# Altium PCB Hitachi_wind_pcb.PcbDoc
Units mm, origin at the board's own origin, x right, y up, seen from the top; angles counter-clockwise.
Board outline 72.95 x 59.62 mm, 2 copper layers (Top Layer, Bottom Layer); 43 components, 26 nets, 194 pads, 17 vias.
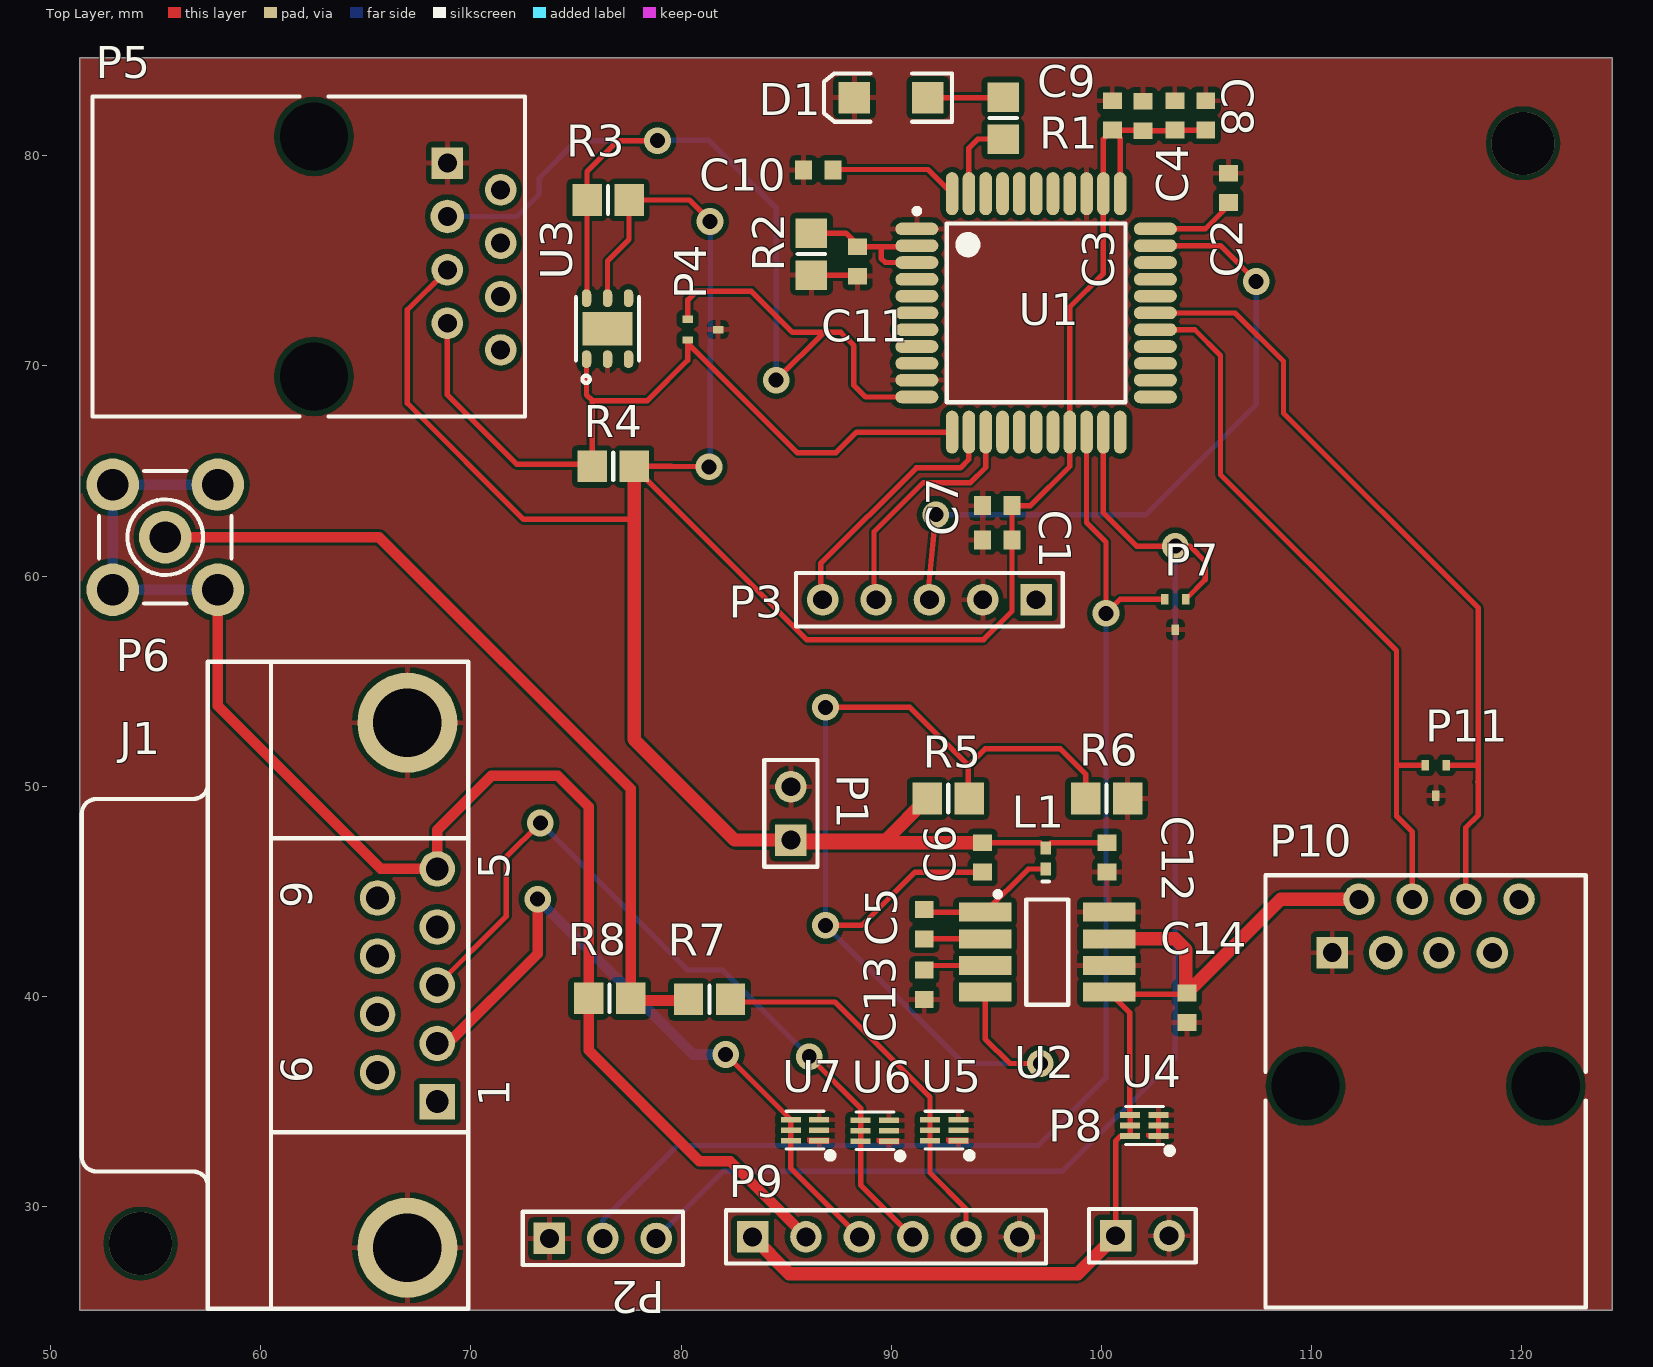
[diagram p0: Top Layer view]
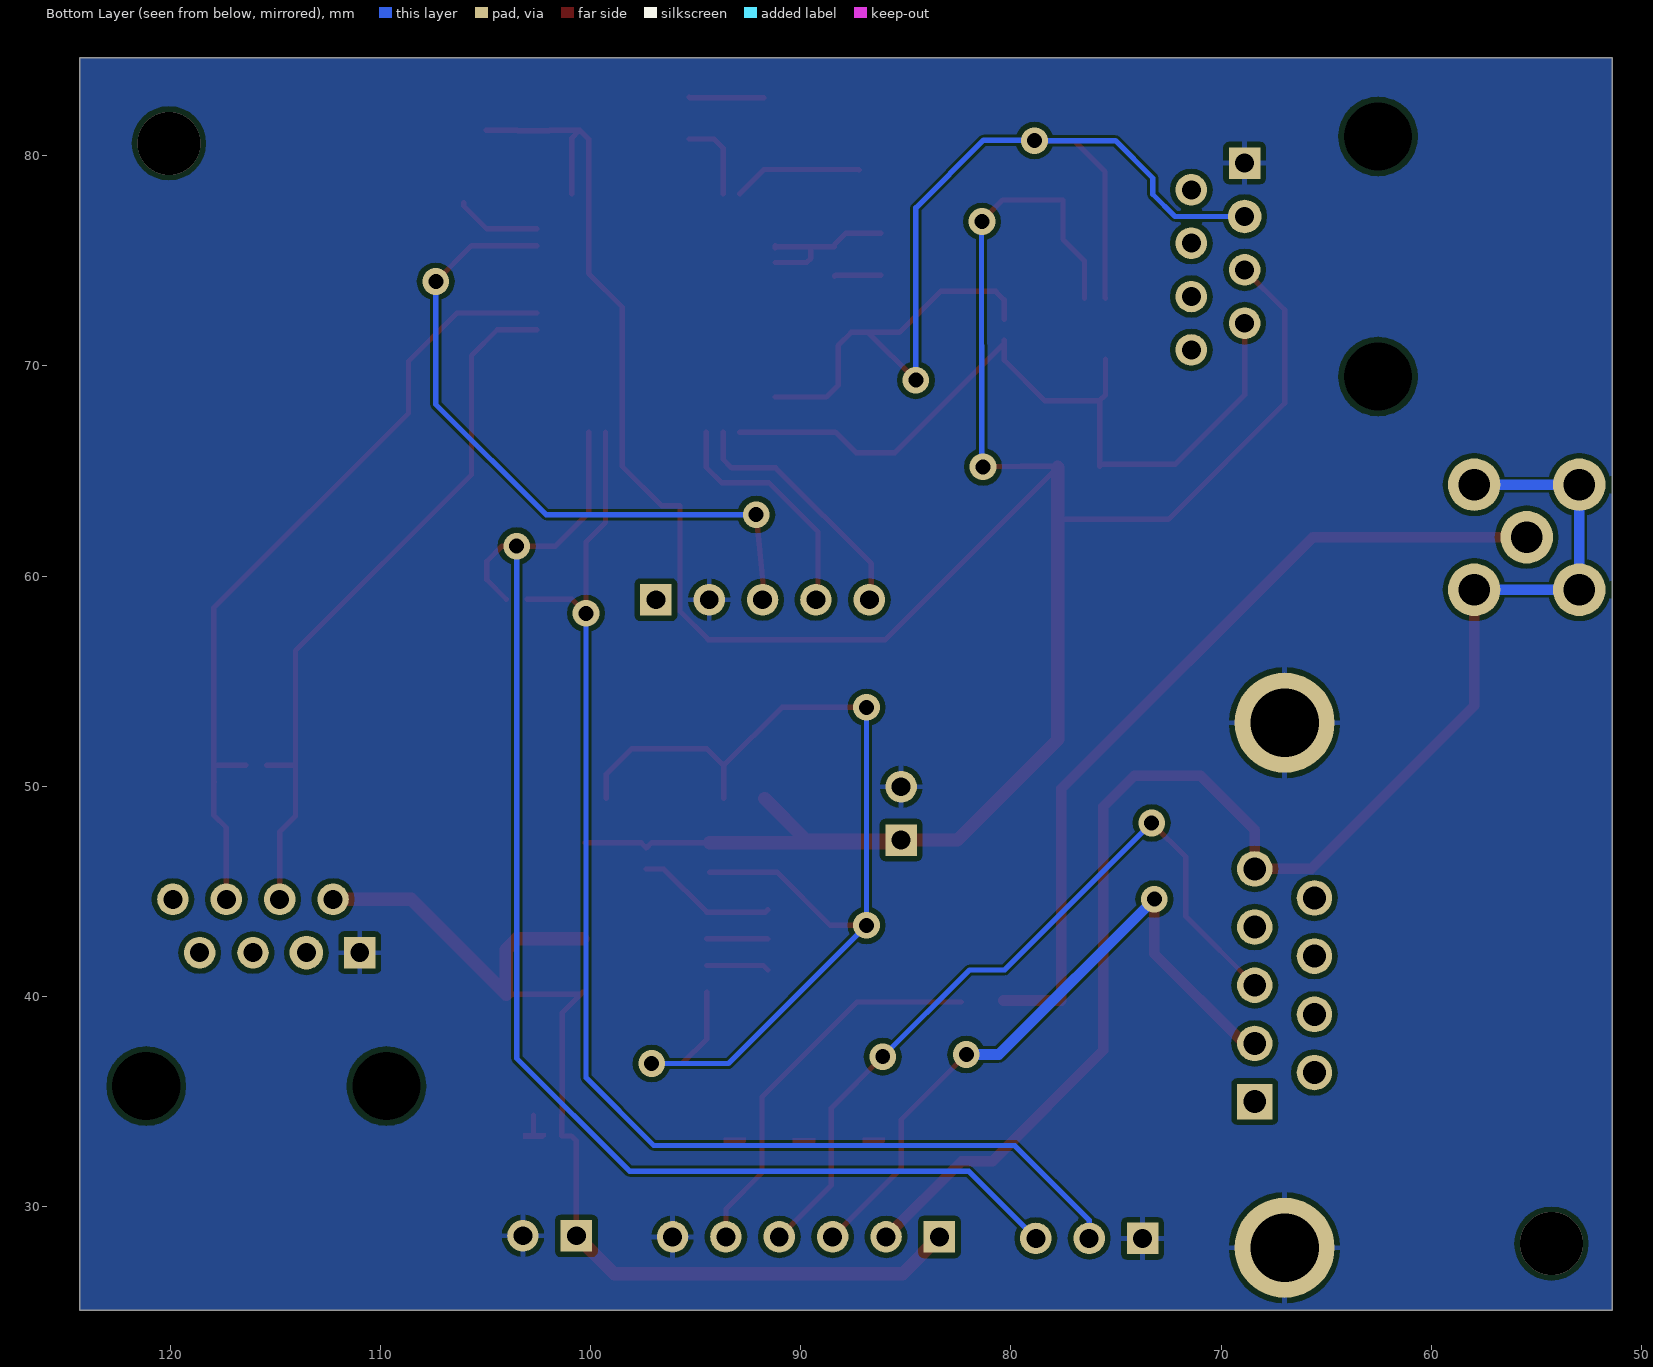
[diagram p1: Bottom Layer view, seen from below]

## Layer stack, top to bottom
Top Solder: solder mask 0.0102, Solder Resist, Dk 3.5
Top Layer: signal copper 0.0356
Dielectric 1: dielectric 0.32, FR-4, Dk 4.8
Bottom Layer: signal copper 0.0356
Bottom Solder: solder mask 0.0102, Solder Resist, Dk 3.5

## Board outline
51.375,25.05 51.375,84.675 124.325,84.675 124.325,25.05

## Design rules (kind name [scope] priority, off if disabled: settings)
Clearance Clearance_3 [InNamedPolygon('TOP-GND')] p1: gap=0.254 ignorepadtopadclearanceinfootprint=FALSE except(0: Arc-Hole Track-Hole SMDPad-Hole THPad-Hole Via-Hole Fill-Hole Poly-Hole Region-Hole Text-Hole; 0.5: Arc-Via Track-Via)
Clearance Clearance_2 [InNamedPolygon('TOP-GND')] p2: gap=0.254 ignorepadtopadclearanceinfootprint=FALSE except(0: Arc-Hole Track-Hole SMDPad-Hole THPad-Hole Via-Hole Fill-Hole Poly-Hole Region-Hole Text-Hole; 0.5: Arc-Via Track-Via)
Clearance Clearance_1 [InNamedPolygon('TOP-GND')] p3: gap=0.254 ignorepadtopadclearanceinfootprint=FALSE except(0: Arc-Hole Track-Hole SMDPad-Hole THPad-Hole Via-Hole Fill-Hole Poly-Hole Region-Hole Text-Hole; 0.5: Arc-Arc Arc-Track Track-Track)
Clearance [All] p4: gap=0.254 ignorepadtopadclearanceinfootprint=TRUE except(0: Arc-Hole Track-Hole SMDPad-Hole THPad-Hole Via-Hole Fill-Hole Poly-Hole Region-Hole Text-Hole; 0.125: Arc-Arc Arc-Track Arc-SMDPad Arc-Fill Arc-Poly Arc-Region Track-Track Track-SMDPad Track-Fill Track-Poly Track-Region SMDPad-SMDPad)
HoleSize [All] p1: absolutevalues=TRUE maxlimit=4 minlimit=0.025 maxpercent=80.000 minpercent=20.000
MinimumSolderMaskSliver [All] p1: minsoldermaskwidth=0
PolygonConnect [All] p1: connectstyle=Relief reliefconductorwidth=0.254 reliefentries=4 polygonreliefangle="90 Angle" airgapwidth=0.254
RoutingVias [All] p1: holewidth=0.711 width=1.27 viastyle="Through Hole" minholewidth=0.711 minwidth=1.27 maxholewidth=2 maxwidth=2
SilkToSolderMaskClearance [IsPad] p1: minsilkscreentomaskgap=0.1 clearancetoexposedcopper=TRUE
SolderMaskExpansion [All] p1: expansion=0.102
Width [All] p1: maxlimit=1 minlimit=0.1 preferedwidth=0.254 minimp=50.000000 maximp=50.000000 favimp=50.000000
27 further rules are at their usual default settings.

## Components (designator, comment, footprint, x,y, rotation, side; value= is the part's Value field where it differs from the comment)
C1 "Cap" 1608[0603] 95.05,61.725 r0 top value=100nF
C2 "Cap" 1608[0603] 106.05,78.475 r90 top value=1uF
C3 "Cap" 1608[0603] 103.5,81.925 r270 top value=100nF
C4 "Cap" 1608[0603] 101.979,81.9 r270 top value=100nF
C5 "Cap" 1608[0603] 91.575,43.425 r270 top value=100pF
C6 "Cap" 1608[0603] 94.35,46.609 r90 top value=100pF
C7 "Cap" 1608[0603] 95.05,63.35 r0 top value=1uF
C8 "Cap" 1608[0603] 104.975,81.925 r270 top value=1uF
C9 "Cap" 1608[0603] 100.525,81.925 r270 top value=1uF
C10 "Cap" 1608[0603] 86.525,79.325 r0 top value=100pF
C11 "Cap" 1608[0603] 88.4,74.975 r90 top value=100nF
C12 "Cap" 1608[0603] 100.275,46.609 r90 top value=100pF
C13 "Cap" 1608[0603] 91.575,40.55 r90 top value=100pF
C14 "Cap" 1608[0603] 104.075,39.45 r90 top value=100pF
D1 "LED0" 3.2X1.6X1.1 90,82.775 r180 top
J1 "D Connector 9" DSUB1.385-2H9 57.475,40.525 r90 top
L1 "Inductor" 0402-A 97.35,46.559 r90 top value=10mH
P1 "voltage tp" HDR1X2 85.225,47.435 r90 top
P2 "FTDI" HDR1X3 73.735,28.475 r0 top
P3 "programmer" HDR1X5 96.9,58.875 r180 top
P4 "ESD-RCLAMP0582B" SC75 81.039,71.732 r180 top
P5 "RJ45 header" "RJ-45 Header" 51.985,75.21 r270 top
P6 "SMB" SMB_V-RJ45 55.45,61.85 r0 top
P7 "ESD-RCLAMP0582B" SC75 103.525,58.175 r90 top
P8 "V_input" HDR1X2 100.685,28.6 r0 top
P9 "General_connector" HDR1X6 83.405,28.55 r0 top
P10 "inclinometer_header" "RJ-45 Header" 115.44,25.185 r0 top
P11 "ESD-RCLAMP0582B" SC75 115.925,50.275 r90 top
R1 "Res1" 6-0805_M 95.325,81.8 r270 top value=1.5K
R2 "POT" 6-0805_M 86.2,75.325 r90 top value=1000
R3 "Res1" 6-0805_M 76.525,77.9 r0 top value=4K
R4 "Res1" 6-0805_M 76.775,65.225 r180 top value=4K
R5 "Res1" 6-0805_M 92.716,49.414 r180 top value=1K
R6 "Res1" 6-0805_M 100.254,49.414 r180 top value=1K
R7 "Res1" 6-0805_M 81.354,39.85 r0 top value=1K
R8 "Res1" 6-0805_M 76.6,39.9 r0 top value=1K
U1 "CY8C424xTQFP44" CYP-AX44-51-85064_M 96.9,72.525 r0 top
U2 "LMR23625Q1" SOIC-8 97.425,42.1 r0 top
U3 "SHT21" SON100P300X300X110-7N 76.5,71.775 r90 top
U4 "TVS3300" WSON-6_M 102.05,33.85 r90 top
U5 "TVS3300" WSON-6_M 92.525,33.625 r90 top
U6 "TVS3300" WSON-6_M 89.225,33.6 r90 top
U7 "TVS3300" WSON-6_M 85.9,33.625 r90 top

## Footprints (in the part's own frame and the unit in brackets; to place one, negate y for a bottom-side part, rotate by r counter-clockwise, add the part's x,y. Pads: shape width x height; smd on the part's side, far side on the other; paste and mask are expansions set on the pad)
3.2X1.6X1.1 [mm] "SMT LED; 2 Flat Leads"
  rect 1.5x1.5 smd: 1(-1.75,0) 2(1.75,0)
  silkscreen extent -2.9,-1.15 3.2,1.15
6-0805_M [mm] "Chip Resistor, Body 2.0x1.2mm, IPC Low Density"
  rect 1.4x1.5 smd: 1(-1,0) 2(1,0)
  silkscreen extent 0,-0.65 0,0.65, body extent -1.07,-0.7 1.07,0.7, height 0.7
0402-A [mm] "Chip Inductor, Body 1.0x0.5mm, IPC High Density"
  rect 0.6x0.5 smd: 1(-0.5,0) 2(0.5,0)
  silkscreen extent -1.1,-0.15 -1.1,0.15, body extent -0.55,-0.3 0.55,0.3, height 0.55
1608[0603] [mm] "Chip Capacitor, Body 1.6x0.8mm, IPC High Density"
  rect 0.8x0.9 smd: 1(-0.7,0) 2(0.7,0)
  body extent -0.87,-0.48 0.87,0.48, height 1.3
CYP-AX44-51-85064_M [mm] "TQFP, 44-Leads, Body 10x10mm, Pitch 0.8mm, IPC Low Density"
  oval 2.05x0.6 smd: 1(-5.675,4) 2(-5.675,3.2) 3(-5.675,2.4) 4(-5.675,1.6) 5(-5.675,0.8) 6(-5.675,0) 7(-5.675,-0.8) 8(-5.675,-1.6) 9(-5.675,-2.4) 10(-5.675,-3.2) 11(-5.675,-4) 23(5.675,-4) 24(5.675,-3.2) 25(5.675,-2.4) 26(5.675,-1.6) 27(5.675,-0.8) 28(5.675,0) 29(5.675,0.8) 30(5.675,1.6) 31(5.675,2.4) 32(5.675,3.2) 33(5.675,4)
  oval 0.6x2.05 smd: 12(-4,-5.675) 13(-3.2,-5.675) 14(-2.4,-5.675) 15(-1.6,-5.675) 16(-0.8,-5.675) 17(0,-5.675) 18(0.8,-5.675) 19(1.6,-5.675) 20(2.4,-5.675) 21(3.2,-5.675) 22(4,-5.675) 34(4,5.675) 35(3.2,5.675) 36(2.4,5.675) 37(1.6,5.675) 38(0.8,5.675) 39(0,5.675) 40(-0.8,5.675) 41(-1.6,5.675) 42(-2.4,5.675) 43(-3.2,5.675) 44(-4,5.675)
  silkscreen extent -5.8,-4.25 4.25,4.97, body extent -5,-5 5,5, height 1.6
DSUB1.385-2H9 [mm] "Connector; D Subminiature; 9 Position; Right Angle; Pitch 1.385 mm"
  rect 1.69x1.69 hole 1.09: 1(-5.54,-10.92)
  round 1.69 hole 1.09: 2(-2.77,-10.92) 3(0,-10.92) 4(2.77,-10.92) 5(5.54,-10.92) 6(-4.155,-8.08) 7(-1.385,-8.08) 8(1.385,-8.08) 9(4.155,-8.08)
  round 4.76 hole 3.26: 10(-12.495,-9.5) 11(12.495,-9.5)
  silkscreen extent -15.4,-12.4 15.4,6
HDR1X2 [mm] "Connector; Header; 2 Position"
  rect 1.5x1.5 hole 0.9: 1(0,0)
  round 1.5 hole 0.9: 2(2.54,0)
  silkscreen extent -1.27,-1.27 3.81,1.27
HDR1X3 [mm] "Connector; Header; 3 Position"
  rect 1.5x1.5 hole 0.9: 1(0,0)
  round 1.5 hole 0.9: 2(2.54,0) 3(5.08,0)
  silkscreen extent -1.27,-1.27 6.35,1.27
HDR1X5 [mm] "Connector; Header; 5 Position"
  rect 1.5x1.5 hole 0.9: 1(0,0)
  round 1.5 hole 0.9: 2(2.54,0) 3(5.08,0) 4(7.62,0) 5(10.16,0)
  silkscreen extent -1.27,-1.27 11.43,1.27
HDR1X6 [mm] "Connector; Header; 6 Position"
  rect 1.5x1.5 hole 0.9: 1(0,0)
  round 1.5 hole 0.9: 2(2.54,0) 3(5.08,0) 4(7.62,0) 5(10.16,0) 6(12.7,0)
  silkscreen extent -1.27,-1.27 13.97,1.27
"RJ-45 Header" [mm] "Connector; PCB Jack, Thru-Hole; 1-Port; Unshielded without Lightpipes; Right Angle"
  rect 1.5x1.5 hole 0.9: 1(-4.445,16.89)
  round 1.5 hole 0.9: 2(-3.175,19.43) 4(-0.635,19.43) 5(0.635,16.89) 6(1.905,19.43) 7(3.175,16.89) 8(4.445,19.43)
  round 1.6 hole 0.9: 3(-1.905,16.89)
  round 2.95 hole 3.25 unplated: MH1(-5.715,10.54) MH2(5.715,10.54)
  silkscreen extent -7.62,0 7.62,20.58
SC75 [mil]
  rect 20x14 smd: 1(28.5,19.5) 2(-28.5,0) 3(28.5,-19.5)
SMB_V-RJ45 [mm] "Connector; SMB Straight"
  round 2.5 hole 1.5: 1(0,0) 2(-2.5,-2.5) 2(-2.5,2.5) 2(2.5,-2.5) 2(2.5,2.5)
  silkscreen extent -3.15,-3.15 3.15,3.15
SOIC-8 [mm]
  rect 2.5x0.9 smd: 1(-2.95,1.905) 2(-2.95,0.635) 3(-2.95,-0.635) 4(-2.95,-1.905) 5(2.95,-1.905) 6(2.95,-0.635) 7(2.95,0.635) 8(2.95,1.905)
  silkscreen extent -2.47,-2.5 1,2.88, body extent -3,-2.45 3,2.45, height 1.75
SON100P300X300X110-7N [mm]
  oval 0.85x0.45 smd: 1(-1.45,1) 2(-1.45,0) 3(-1.45,-1) 4(1.45,-1) 5(1.45,0) 6(1.45,1)
  rect 1.6x2.4 smd: 7(0,0)
  silkscreen extent -2.58,-1.5 1.5,1.5
WSON-6_M [mm] "WSON, 6-Leads, Body 1.55x1.55mm, Pitch 0.5mm, IPC Low Density"
  rect 0.28x0.95 smd paste-0.025 mask+0.05: 1(-0.5,-0.675) 2(0,-0.675) 3(0.5,-0.675) 4(0.5,0.675) 5(0,0.675) 6(-0.5,0.675)
  Top Layer region: -0.64,-0.2 -0.54,-0.1 -0.36,-0.1 -0.36,-1.15 -0.64,-1.15
  silkscreen extent -1.35,-1.35 0.9,0.9, body extent -0.77,-0.77 0.77,0.77, height 0.8

## Part data
C1 C2 C3 C4 C5 C6 C7 C8 C9 C10 C11 C12 C13 C14: "Capacitor", LatestRevisionDate=17-Jul-2002, LatestRevisionNote="Re-released for DXP Platform.", PackageDescription="Radial Cap, Thru-Hole; 2 Leads; 0.3 in Pin Spacing", PackageReference=RAD-0.3, Published=8-Jun-2000, Publisher="Altium Limited"
D1: "Typical INFRARED GaAs LED", LatestRevisionDate=08-Jul-2005, LatestRevisionNote="Mech Layer 1 removed.", PackageDescription="LED; 2 Leads", PackageReference=LED-0, Published=8-Jun-2000, Publisher="Altium Limited"
J1: "Receptacle Assembly, 9 Position, Right Angle", PackageDocument=O, DatasheetDocument=1-Sep-1999, Gender=Receptacle, LatestRevisionDate=17-Jul-2002, LatestRevisionNote="Re-released for DXP Platform.", Orientation="Right Angle", PackageReference=788750, Positions=9, Published=15-Jun-2001, Publisher="Altium Limited"
P1 P8: library part "Header 2", "Header, 2-Pin", LatestRevisionDate=17-Jul-2002, LatestRevisionNote="Re-released for DXP Platform.", Publisher="Altium Limited"
P2 P4 P7 P11: library part "Header 3", "Header, 3-Pin", LatestRevisionDate=17-Jul-2002, LatestRevisionNote="Re-released for DXP Platform.", Publisher="Altium Limited"
P3: library part "Header 5", "Header, 5-Pin", LatestRevisionDate=17-Jul-2002, LatestRevisionNote="Re-released for DXP Platform.", Publisher="Altium Limited"
P5 P10 U2: library part "Header 8", "Header, 8-Pin", LatestRevisionDate=17-Jul-2002, LatestRevisionNote="Re-released for DXP Platform.", Publisher="Altium Limited"
P6: "SMB Straight Connector", LatestRevisionDate=17-Jul-2002, LatestRevisionNote="Re-released for DXP Platform.", Publisher="Altium Limited"
P9: library part "Header 6", "Header, 6-Pin", LatestRevisionDate=17-Jul-2002, LatestRevisionNote="Re-released for DXP Platform.", Publisher="Altium Limited"
R1 R3 R4 R5 R6 R7 R8: "Resistor", LatestRevisionDate=17-Jul-2002, LatestRevisionNote="Re-released for DXP Platform.", PackageDescription="Axial Device, Thru-Hole; 2 Leads; 0.3 in Pin Spacing", PackageReference=AXIAL-0.3, Published=8-Jun-2000, Publisher="Altium Limited"
R2: library part Res1, "Resistor", LatestRevisionDate=17-Jul-2002, LatestRevisionNote="Re-released for DXP Platform.", PackageDescription="Axial Device, Thru-Hole; 2 Leads; 0.3 in Pin Spacing", PackageReference=AXIAL-0.3, Published=8-Jun-2000, Publisher="Altium Limited"
U1: Part Number=CY8C424xTQFP44*
U3: "SHT21 Series 3 V -40 to +125 °C Digital Humidity & Temperature Sensor IC - DFN-6", Package="DFN-6 Sensirion", Availability=Good, MF=Sensirion, MP=SHT21, Price="4.63 USD", SnapEDA_Link=https://www.snapeda.com/parts/SHT21/Sensirion/view-part/?ref=snap
U4 U5 U6 U7: library part "Header 3X2A", "Header, 3-Pin, Dual row", LatestRevisionDate=17-Jul-2002, LatestRevisionNote="Re-released for DXP Platform.", Publisher="Altium Limited"
L1: Code_IEC=1005, Code_JEITA=0402, LatestRevisionDate=29-May-2009, LatestRevisionNote="IPC-7351 Footprint Added.", PackageDescription="Chip Inductor", PackageReference=0402-A, Published=8-Jun-2000, Publisher="Altium Limited"

## Via types
v1: diameter 1.27, hole 0.711, Top Layer to Bottom Layer, 15 vias
v2: diameter 3, hole 3, Top Layer to Bottom Layer, 2 vias

## Nets (pads, with @x,y where several pads share a name; then routed paths per layer and width w, separated by ;. In a path a pad name is that pad's centre, name@x,y a point inside that pad or via, vN(x,y) a via of type N, cw(c..) or ccw(c..) an arc to the next point about the centre after c; other vN are vias at no path point)
AGND_REG: C1.1 C2.2 C3.1 C4.1 C7.1 C8.1 C9.1 C10.1 C11.1 C12.1 C13.1 C14.1 D1.2 J1.10 J1.11 P1.2 P2.1 P3.2 P4.2 P5.1 P7.2 P8.2 P9.6 P10.1 P11.2 R2.1 R6.1 U1.1 U1.10 U1.36 U2.6 U2.8 U3.2 U4.1 U4.2 U4.3 U5.1 U5.2 U5.3 U6.1 U6.2 U6.3 U7.1 U7.2 U7.3 | length 3.2
  Top Layer w0.254: R2.1 88.35,74.325 C11.1 ; U4.1 U4.2 U4.3
black: J1.5 P6.2 P9.2 R8.1 | length 70.5
  Top Layer w0.508: P6.2@57.95,59.35 57.95,53.825 65.71,46.065 J1.5 68.395,47.915 70.98,50.5 74.125,50.5 75.6,49.025 R8.1 75.6,37.425 80.875,32.15 82.345,32.15 P9.2
  Bottom Layer w0.508: P6.2@57.95,59.35 52.95,59.35 52.95,64.35 P6.2@57.95,64.35
bnc: P6.1 R7.1 R8.2 | length 39.8
  Top Layer w0.508: P6.1 65.625,61.85 77.6,49.875 R8.2 ; R8.2@77.6,39.8 R7.1@80.354,39.8
BOOT_REG: C5.2 U2.2 | length 2.9
  Top Layer w0.254: C5.2 91.585,42.735 U2.2
br_gr: J1.3 P9.4 U6.4 U6.5 U6.6 | length 37.8
  Top Layer w0.254: J1.3 71.675,43.805 71.675,46.625 v1(73.3,48.25) ; v1(86.1,37.125) 88.55,34.675 U6.4 U6.5 U6.6 88.55,31.025 P9.4
  Bottom Layer w0.254: v1(73.3,48.25) 80.3,41.25 81.975,41.25 v1(86.1,37.125)
br_ye: J1.2 P9.3 U7.4 U7.5 U7.6 | length 32.2
  Top Layer w0.254: v1(82.125,37.225) U7.4 U7.5 U7.6 85.225,31.81 P9.3
  Top Layer w0.508: J1.2@68.69,37.75 68.9,37.75 73.175,42.025 v1(73.175,44.625)
  Bottom Layer w0.508: v1(73.175,44.625) 80.575,37.225 v1(82.125,37.225)
FB_REG: C6.1 R5.1 R6.2 U2.4 | length 54.3
  Top Layer w0.254: v1(86.875,43.375) 88.6,43.375 91.134,45.909 C6.1 ; v1(86.875,53.75) 90.9,53.75 93.675,50.975 ; R5.1@93.675,49.414 93.675,50.975 ; U2.4 94.475,37.975 95.65,36.8 v1(97.1,36.8) ; R6.2 99.254,50.571 98.05,51.775 94.475,51.775 93.675,50.975
  Bottom Layer w0.254: v1(86.875,53.75) v1(86.875,43.375) 93.45,36.8 v1(97.1,36.8)
inclin_x: P10.4 P11.1 U1.27 | length 34.7
  Top Layer w0.254: U1.27 104.45,71.725 105.675,70.5 105.675,64.825 114.05,56.45 114.05,51 ; 114.055,49.705 114.05,49.7 ; P10.4 114.805,47.82 114.05,48.575 114.05,49.7 ; P11.1 114.051,50.999 114.05,51 ; 114.05,49.7 114.05,51
inclin_y: P10.6 P11.3 U1.28 | length 38.3
  Top Layer w0.254: U1.28 106.375,72.525 108.675,70.225 108.675,67.75 117.95,58.475 117.95,51 ; P11.3 117.949,50.999 117.95,51 ; P10.6 117.345,48.02 117.95,48.625 117.95,50.225 ; 117.925,50.2 117.95,50.225 ; 117.95,50.225 117.95,51
NetC2_1: C2.1 U1.33 | length 4.1
  Top Layer w0.254: U1.33 104.95,76.525 106.05,77.625 C2.1
NetC10_2: C10.2 U1.44 | length 6.2
  Top Layer w0.254: C10.2 87.25,79.35 91.75,79.35 U1.44
NetC11_2: C11.2 R2.2 U1.2 U1.3 | length 7.8
  Top Layer w0.254: R2.2 87.85,76.325 88.4,75.775 C11.2 89.525,75.675 ; U1.3 89.725,74.925 89.525,75.125 89.525,75.675 ; U1.2 91.225,75.625 91.175,75.675 89.525,75.675
NetD1_1: D1.1 R1.1 | length 3.6
  Top Layer w0.254: D1.1 95.3,82.775 R1.1
NetR1_2: R1.2 U1.43 | length 4
  Top Layer w0.254: U1.43 93.7,80.375 94.125,80.8 R1.2
p3.2: P3.5 U1.13 | length 12.1
  Top Layer w0.254: P3.5@86.645,58.9 86.645,60.595 91.2,65.15 93.29,65.15 93.7,65.56 U1.13
p3.3: P3.4 U1.14 | length 11.5
  Top Layer w0.254: P3.4@89.185,58.9 89.185,62.11 91.525,64.45 93.775,64.45 94.5,65.175 U1.14
pink: P9.5 R7.2 U5.4 U5.5 U5.6 | length 18.7
  Top Layer w0.254: R7.2@82.354,39.725 87.325,39.725 91.85,35.2 U5.4 U5.5 U5.6 91.85,31.6 93.565,29.885 P9.5
Psoc_rx0: P2.2 P7.1 U1.20 | length 61.8
  Top Layer w0.254: U1.20 99.3,62.55 100.225,61.625 v1(100.225,58.225) 100.899,58.899 P7.1
  Bottom Layer w0.254: P2.2 76.275,29.35 79.825,32.9 97,32.9 100.225,36.125 v1(100.225,58.225)
Psoc_tx0: P2.3 P7.3 U1.21 | length 64.5
  Top Layer w0.254: U1.21 100.1,63 101.675,61.425 v1(103.525,61.425) 104.225,61.425 104.95,60.7 104.95,59.829 P7.3
  Bottom Layer w0.254: P2.3 82.015,31.675 98.15,31.675 103.525,37.05 v1(103.525,61.425)
rst: P3.3 U1.32 | length 33.4
  Top Layer w0.254: P3.3@92.125,59.3 91.725,58.9 91.73,58.946 v1(92.125,62.925) ; U1.32 105.675,75.725 v1(107.375,74.025)
  Bottom Layer w0.254: v1(92.125,62.925) 102.125,62.925 107.375,68.175 v1(107.375,74.025)
sht_scl: P4.3 P5.3 R3.1 U1.11 U3.6 | length 55.5
  Top Layer w0.254: U3.6 75.525,73.25 R3.1 75.525,79.25 77,80.725 v1(78.875,80.725) ; P4.3@80.325,72.225 80.325,73.15 80.725,73.55 83.35,73.55 85.3,71.6 86.8,71.6 ; v1(84.525,69.325) 86.8,71.6 ; U1.11 88.775,68.525 88.225,69.075 88.225,70.975 87.6,71.6 86.8,71.6
  Bottom Layer w0.254: P5.3 72.19,77.115 73.25,78.175 73.25,78.95 75.025,80.725 v1(78.875,80.725) ; v1@78.925,80.75 81.3,80.75 84.525,77.525 v1(84.525,69.325)
sht_sda: P4.1 P5.7 R4.2 U1.12 U3.1 | length 38.4
  Top Layer w0.254: P5.7 68.875,68.625 72.175,65.325 75.675,65.325 R4.2 75.775,68.35 ; U3.1 75.5,68.625 75.775,68.35 ; P4.1 P4.1@80.315,71.085 ; U1.12 88.35,66.85 87.375,65.875 85.525,65.875 P4.1@80.315,71.085 ; 75.775,68.35 78.393,68.35 80.315,70.272 P4.1@80.315,71.085
SW_REG: C5.1 L1.1 U2.1 | length 6.7
  Top Layer w0.254: C5.1 91.695,44.005 U2.1 96.529,46.059 L1.1
v4: C1.2 C3.2 C4.2 C6.2 C7.2 C8.2 C9.2 C12.2 L1.2 P1.1 P5.5 R3.2 R4.1 R5.2 U1.19 U1.34 U1.35 U3.5 | length 145.1
  Top Layer w0.254: P5.5 66.975,72.675 66.975,68.225 72.5,62.7 77.75,62.7 77.775,62.725 ; U3.5 76.5,75 77.525,76.025 R3.2 80.4,77.9 v1@81.525,76.775 ; v1(81.325,65.2) 79.525,65.225 R4.1 77.775,65.175 85.975,56.975 94.4,56.975 95.75,58.325 C1.2 C7.2 96.625,63.35 98.5,65.225 U1.19 98.5,72.8 100.1,74.4 U1.35 100.1,80.8 C9.2 ; C6.2 97.1,47.309 L1.2 97.6,47.309 C12.2 ; U1.34 100.9,80.85 C9.2 ; C8.2 C3.2 103.475,81.2 C4.2 101.954,81.225 C9.2
  Top Layer w0.635: R4.1@77.775,65.175 77.775,62.725 77.775,52.22 82.56,47.435 P1.1 ; R5.2 89.738,47.435 P1.1 ; C6.2 85.351,47.309 P1.1
  Bottom Layer w0.254: v1@81.382,65.2 81.4,76.875 v1@81.4,76.9
  other v1: 81.375,76.875
v24: C14.2 P8.1 P9.1 P10.2 U2.5 U2.7 U4.4 U4.5 U4.6 | length 50.9
  Top Layer w0.254: U2.5 U2.5@100.47,40.1 ; P8.1 100.685,33.11 100.925,33.35 U4.6 U4.5 U4.4 101.35,34.325 101.35,39.22 U2.5@100.47,40.1 ; C14.2@104.025,40.1 U2.5@100.47,40.1
  Top Layer w0.635: P9.1 85.155,26.8 98.885,26.8 P8.1 ; U2.7 103.515,42.735 104.025,42.225 C14.2@104.025,40.1 ; C14.2 108.54,44.615 P10.2
VCC_REG: C13.2 U2.3 | length 3
  Top Layer w0.254: C13.2 91.79,41.465 U2.3
pads on no net: J1.1 J1.4 J1.6 J1.7 J1.8 J1.9 P3.1 P5.2 P5.4 P5.6 P5.8 P5.MH1 P5.MH2 P10.3 P10.5 P10.7 P10.8 P10.MH1 P10.MH2 U1.4 U1.5 U1.6 U1.7 U1.8 U1.9 U1.15 U1.16 U1.17 U1.18 U1.22 U1.23 U1.24 U1.25 U1.26 U1.29 U1.30 U1.31 U1.37 U1.38 U1.39 U1.40 U1.41 U1.42 U3.3 U3.4 U3.7
copper on no net:
  other v2: 54.275,28.225 120.075,80.6

## Polygon pours and split planes (outlines as drawn)
AGND_REG on Bottom Layer "Bottom_gnd" (solid, pour order 20): 51.375,25.05 51.375,84.675 124.325,84.675 124.325,25.05
AGND_REG on Top Layer "Top_gnd" (solid, pour order 21): 51.375,25.05 51.375,84.675 124.325,84.675 124.325,25.05

## Silkscreen, mask and mechanical layers (free items; w line width, h text height)
Mechanical 1:
  the board outline again, w0.254

## Text inside footprints (layer, text, board x,y; h text height)
J1: Top Overlay "1" at 71.85,34.735 h1.5 r90; Top Overlay "5" at 71.85,45.565 h1.5 r90; Top Overlay "9" at 62.45,44.18 h1.5 r90; Top Overlay "6" at 62.45,35.87 h1.5 r90